# EAGLE board arduino-breakout (EAGLE 4.16)
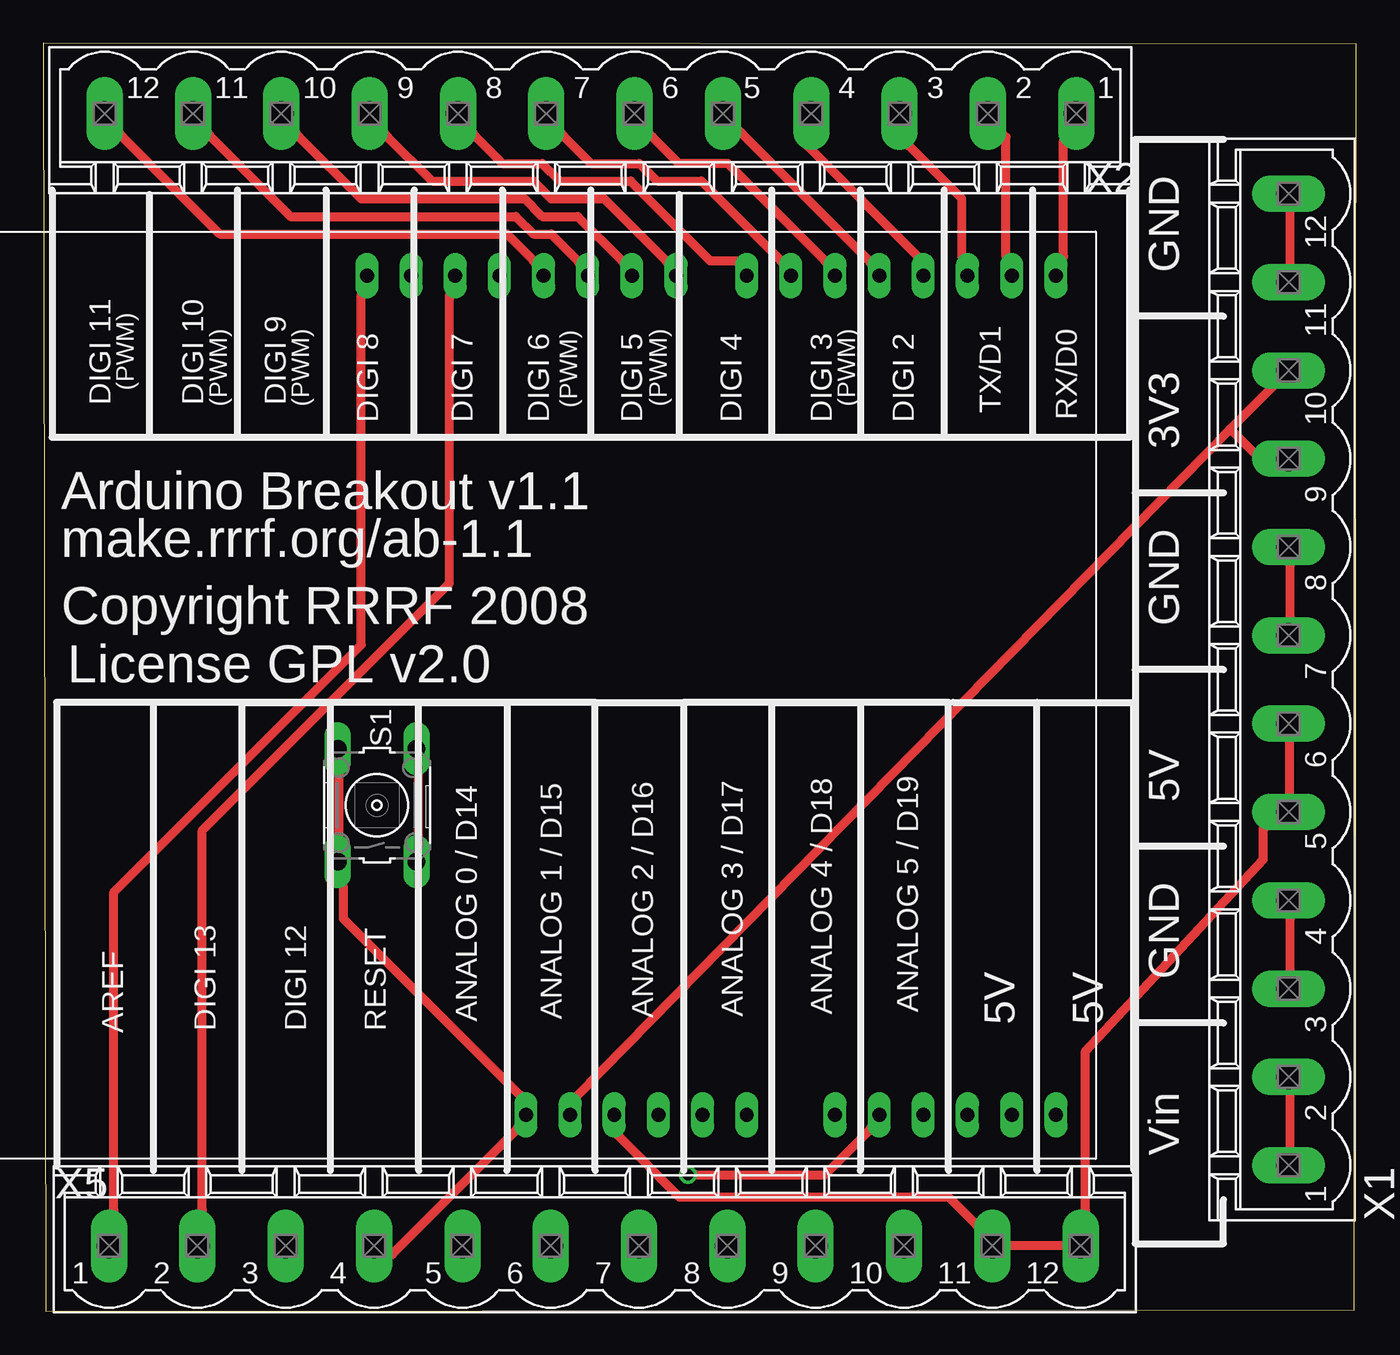
[diagram p0: board, top side]
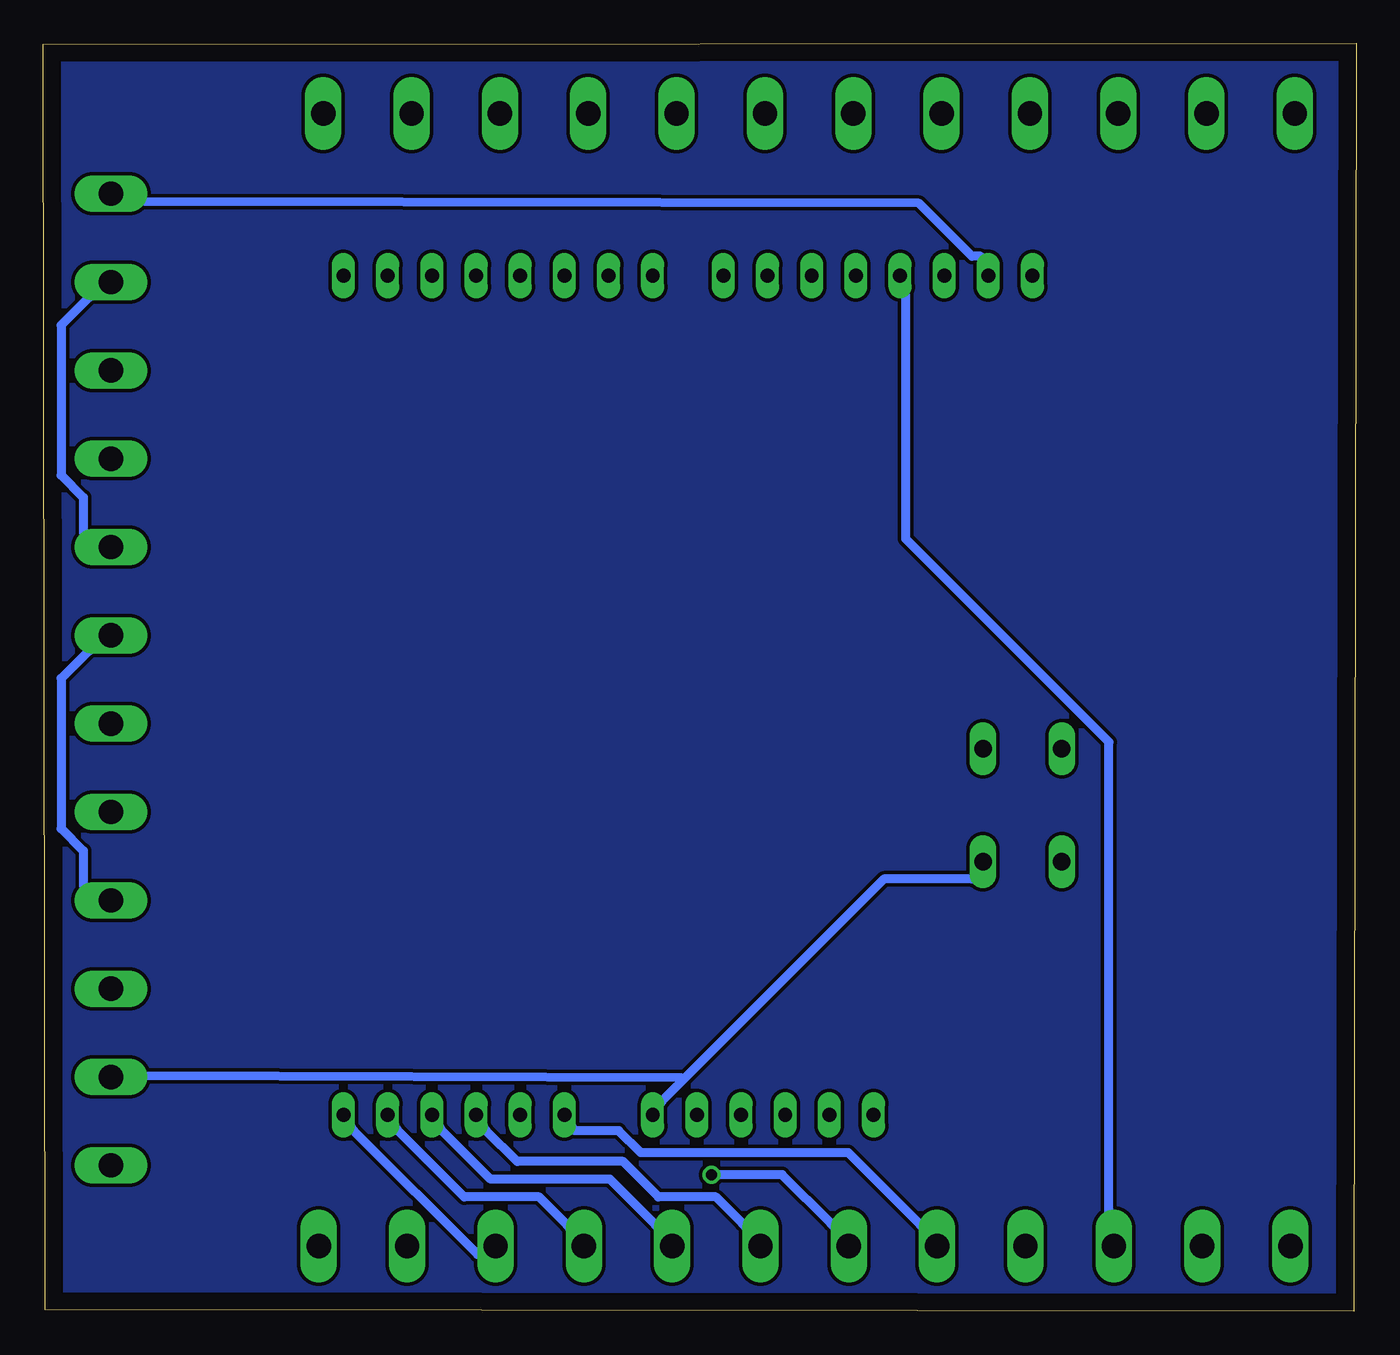
[diagram p1: board, bottom side, seen from below]

Size 75.49 x 72.91 mm. Coordinates in mm from the lower left corner, seen from the top.
Outline: 0.13,0 75.39,0.07 75.49,72.86 0,72.91 0.13,0
Copper layers (1*16): Top 0.035mm / dielectric 1.5mm / Bottom 0.035mm
Design rules "default": minimum track width 10mil, minimum drill 24mil, track to track 8mil, track to pad 8mil, pad to pad 8mil, via to via 8mil, smd to smd 8mil, copper to edge 40mil, drill to drill 8mil, minimum pad ring 10mil, minimum via ring 8mil, stop-mask expansion 4mil, vias tented up to drill 0mil, thermal gap 20mil
Net classes: 0 default: width 0.508 mm, drill 0.406 mm

## Footprints (pad centres in the part's own frame; a part is rotated, then mirrored left to right if it is on the bottom)
B3F-10XX = drill 1.016 long: 1 -3.251,2.261; 2 3.251,2.261; 3 -3.251,-2.261; 4 3.251,-2.261
ARDUINO = drill 0.8 long: 3V3 6.604,-45.72; 5V 9.144,-45.72; ANALOG0 21.844,-45.72; ANALOG1 24.384,-45.72; ANALOG2 26.924,-45.72; ANALOG3 29.464,-45.72; ANALOG4 32.004,-45.72; ANALOG5 34.544,-45.72; AREF -5.08,2.54; DIGITAL2 29.464,2.54; DIGITAL3 26.924,2.54; DIGITAL4 24.384,2.54; DIGITAL5 21.844,2.54; DIGITAL6 19.304,2.54; DIGITAL7 16.764,2.54; DIGITAL8 12.7,2.54; DIGITAL9 10.16,2.54; DIGITAL10 7.62,2.54; DIGITAL11 5.08,2.54; DIGITAL12 2.54,2.54; DIGITAL13 0,2.54; GND -2.54,2.54; GND1 14.224,-45.72; GND2 11.684,-45.72; RESET 4.064,-45.72; RX 34.544,2.54; TX 32.004,2.54; VIN 16.764,-45.72
MSTBV12 = drill 1.397 long: 1 -27.94,0; 2 -22.86,0; 3 -17.78,0; 4 -12.7,0; 5 -7.62,0; 6 -2.54,0; 7 2.54,0; 8 7.62,0; 9 12.7,0; 10 17.78,0; 11 22.86,0; 12 27.94,0

## Placement (x,y rotation side)
S1  [B3F-10XX]  19.19,29.1 90 top
U$1  ARDUINODIECIMILIA  [ARDUINO]  23.69,57.02 0 top
X1  MSTBV12  [MSTBV12]  71.62,36.33 90 top
X2  MSTBV12  [MSTBV12]  31.46,68.88 180 top
X5  MSTBV12  [MSTBV12]  31.71,3.75 0 top

## Library data of the parts
S1 = switch-omron
U$1 = reprap
X1 X2 X5 = con-phoenix-508

## Nets
N$1: U$1.RX X2.1
N$2: U$1.TX X2.2
N$3: U$1.DIGITAL2 X2.3
N$4: U$1.DIGITAL3 X2.4
N$5: U$1.DIGITAL4 X2.5
N$6: U$1.DIGITAL5 X2.6
N$7: U$1.DIGITAL6 X2.7
N$8: U$1.DIGITAL7 X2.8
N$9: U$1.DIGITAL8 X2.9
N$10: U$1.DIGITAL9 X2.10
N$11: U$1.DIGITAL10 X2.11
N$12: U$1.DIGITAL11 X2.12
N$13: U$1.DIGITAL12 X5.3
N$14: U$1.DIGITAL13 X5.2
N$15: S1.1 S1.2 U$1.RESET X5.4
N$17: U$1.ANALOG5 X5.10
N$18: U$1.ANALOG4 X5.9
N$19: U$1.ANALOG3 X5.8
N$20: U$1.ANALOG2 X5.7
N$21: U$1.ANALOG1 X5.6
N$22: U$1.ANALOG0 X5.5
N$23: U$1.AREF X5.1
N$24: U$1.GND X1.3 X1.4 X1.7 X1.8 X1.11 X1.12
N$25: U$1.5V X1.5 X1.6 X5.11 X5.12
N$26: U$1.3V3 X1.9 X1.10
N$27: S1.3 S1.4 U$1.VIN X1.1 X1.2

## Tracks (layer width: path | path; a pad name or v marks a point on that pad's centre or on a via)
GND
  pour Bottom: 0.35,72.72 75.05,72.72 75.05,0.32 0.35,0.32
N$1
  Top 0.508: U$1.RX 58.66,60.68 58.66,67.28 X2.1
N$2
  Top 0.508: U$1.TX 55.36,60.68 55.36,67.53 X2.2
N$3
  Top 0.508: U$1.DIGITAL2 52.82,60.68 52.82,63.98 49.77,67.03 X2.3
N$4
  Top 0.508: U$1.DIGITAL3 50.28,60.68 43.93,67.03 X2.4
N$5
  Top 0.508: U$1.DIGITAL4 47.49,60.42 40.12,67.79 X2.5
N$6
  Top 0.508: U$1.DIGITAL5 44.95,60.42 39.36,66.01 36.56,66.01 35.04,67.53 X2.6
N$7
  Top 0.508: U$1.DIGITAL6 42.41,60.42 37.83,64.99 35.29,64.99 34.28,66.01 31.48,66.01 29.96,67.53 X2.7
N$8
  Top 0.508: U$1.DIGITAL7 39.87,60.42 38.34,60.42 33.77,64.99 29.71,64.99 28.69,66.01 26.4,66.01 24.88,67.53 X2.8
N$9
  Top 0.508: U$1.DIGITAL8 35.8,60.42 32.25,63.98 29.2,63.98 28.18,64.99 22.34,64.99 19.8,67.53 X2.9
N$10
  Top 0.508: U$1.DIGITAL9 33.26,60.42 30.72,62.96 28.69,62.96 27.67,63.98 18.28,63.98 14.72,67.53 X2.10
N$11
  Top 0.508: U$1.DIGITAL10 30.72,60.42 29.2,61.95 28.18,61.95 27.17,62.96 14.21,62.96 9.64,67.53 X2.11
N$12
  Top 0.508: U$1.DIGITAL11 28.18,60.42 26.66,61.95 10.15,61.95 4.56,67.53 X2.12
N$13
  Bottom 0.508: U$1.DIGITAL12 25.9,58.39 25.9,44.42 14.21,32.74 14.21,5.81 X5.3
N$14
  Top 0.508: U$1.DIGITAL13 23.36,58.39 23.36,41.88 9.13,27.66 9.13,5.81 X5.2
N$15
  Top 0.508: S1.2 17.01,30.96 17.01,27.15 S1.1 17.26,24.35 17.26,22.58 27.42,12.42 U$1.RESET 27.17,10.38 20.05,3.27 X5.4
N$17
  Bottom 0.508: U$1.ANALOG5 57.65,10.38 50.53,3.27 X5.10
N$18
  Bottom 0.508: U$1.ANALOG4 55.11,10.38 51.3,6.57 46.98,6.57 45.45,5.05 X5.9
N$19
  Bottom 0.508: U$1.ANALOG3 52.57,10.38 49.77,7.59 42.91,7.59 40.37,5.05 X5.8
N$20
  Bottom 0.508: U$1.ANALOG2 50.03,10.38 48.25,8.61 42.15,8.61 40.12,6.57 36.82,6.57 35.29,5.05 X5.7
N$21  (via drill 0.61)
  Top 0.508: v37.07,7.84 44.95,7.84 47.49,10.38 U$1.ANALOG1
  Bottom 0.508: v37.07,7.84 33.01,7.84 30.21,5.05 X5.6
N$22
  Bottom 0.508: U$1.ANALOG0 44.95,10.38 42.41,10.38 41.14,9.11 29.2,9.11 25.13,5.05 X5.5
N$23
  Top 0.508: U$1.AREF 18.28,58.39 18.28,38.32 4.05,24.1 4.05,5.81 X5.1
N$24
  Top 0.508: X1.3 71.68,19.37 71.68,22.68 X1.4 | X1.7 71.68,39.69 71.68,43 X1.8 | X1.11 71.68,60.01 71.68,63.32 X1.12
  Bottom 0.508: X1.4 73.2,24.45 73.2,26.49 74.47,27.76 74.47,36.39 72.95,37.92 X1.7 | U$1.GND 21.58,60.68 22.09,60.68 25.13,63.72 69.65,63.82 X1.12 | X1.8 73.2,44.77 73.2,46.81 74.47,48.08 74.47,56.71 72.95,58.24 X1.11
N$25
  Top 0.508: X1.6 71.68,32.84 71.68,29.53 X1.5 70.15,27.76 70.15,25.98 59.93,14.96 59.93,5.81 X5.12 58.66,3.78 55.61,3.78 X5.11 53.58,5.05 52.06,6.57 36.56,6.57 33.01,10.13 U$1.5V
N$26
  Top 0.508: 68.25,50.74 70.66,53.16 X1.10 | 68.25,50.74 30.72,12.42 U$1.3V3 | X1.9 69.65,49.35 68.25,50.74
N$27
  Top 0.508: X1.1 71.68,9.21 71.68,12.52 X1.2 | S1.4 21.58,30.96 21.58,27.15 S1.3
  Bottom 0.508: 38.72,13.3 27.17,24.86 22.09,24.86 S1.3 | 38.72,13.3 39.87,12.16 U$1.VIN | X1.2 69.65,13.53 38.85,13.43 38.72,13.3

## Text on the board
tPlace: GND | TX/D1 | RX/D0 | DIGI 11 | (PWM) | DIGI 10 | DIGI 9 | (PWM) | (PWM) | DIGI 8 | DIGI 7 | DIGI 6 | (PWM) | DIGI 5 | (PWM) | DIGI 4 | DIGI 3 | (PWM) | DIGI 2 | 3V3 | Arduino Breakout v1.1 | make.rrrf.org/ab-1.1 | Copyright RRRF 2008 | GND | License GPL v2.0 | 5V | GND | ANALOG 5 / D19 | DIGI 13 | DIGI 12 | RESET | ANALOG 0 / D14 | ANALOG 1 / D15 | ANALOG 2 / D16 | ANALOG 3 / D17 | ANALOG 4 / D18 | 5V | 5V | AREF | Vin